# Altium PCB motor_driver.PcbDoc (part 2 of 4)
Units mil, origin at the board's own origin, x right, y up, seen from the top; angles counter-clockwise.
Board outline 2915 x 1500 mil, 2 copper layers (Top Layer, Bottom Layer); 45 components, 39 nets, 213 pads, 173 vias.
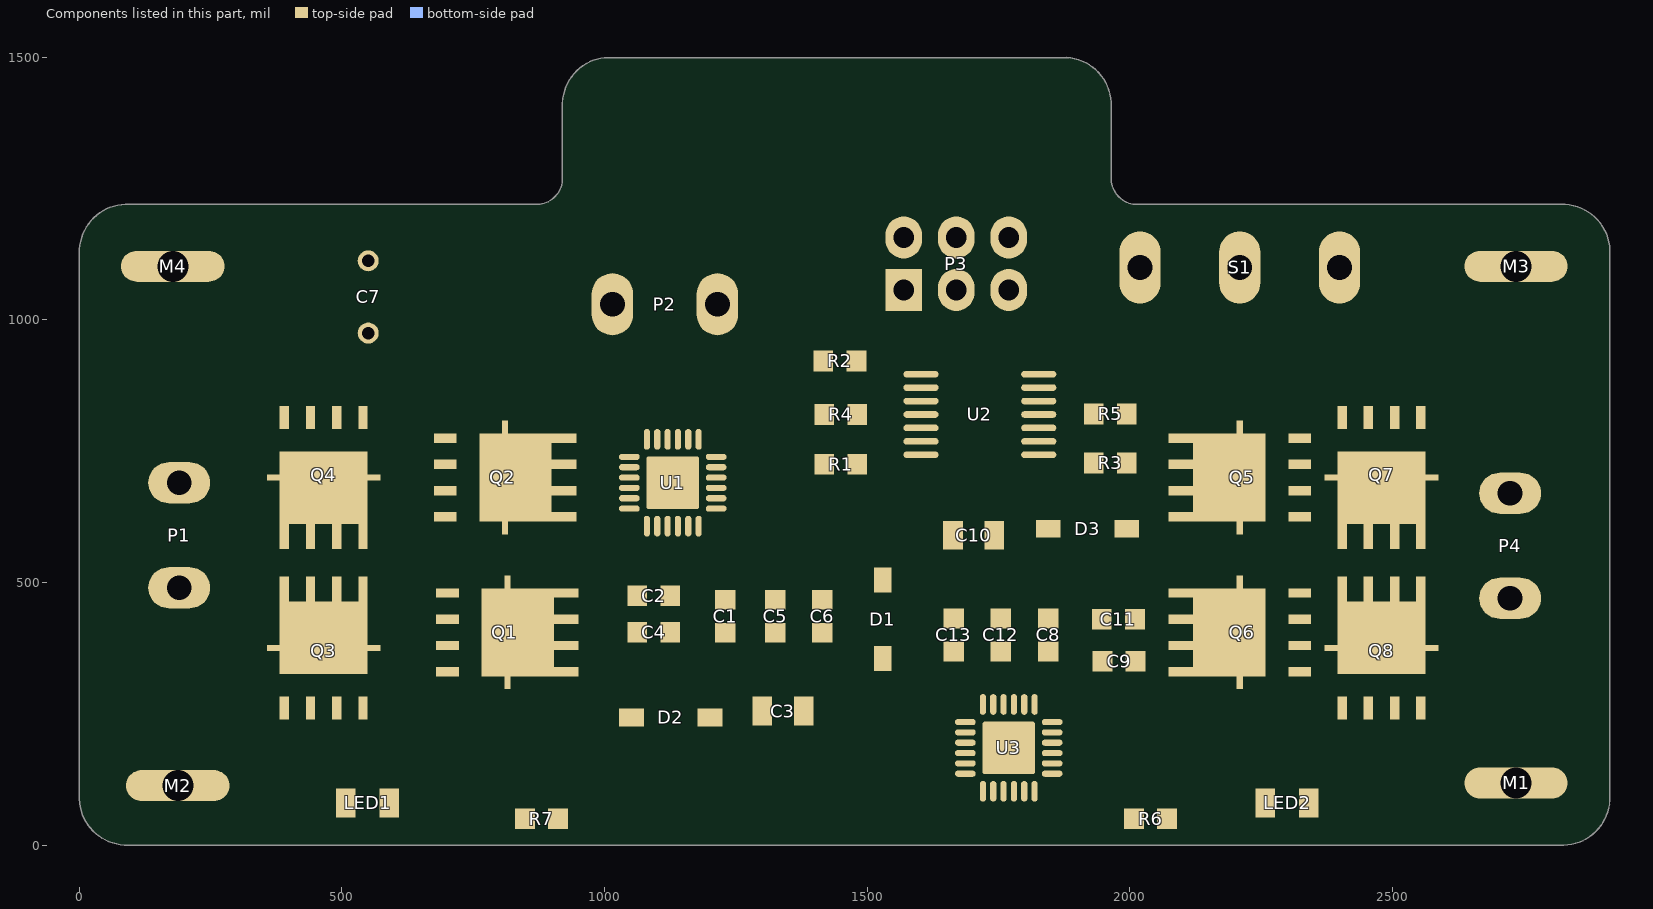
[diagram p2: the components of this part, seen from the top]

## Via types
v1: diameter 22, hole 12, Top Layer to Bottom Layer, tented both sides, 173 vias

## Nets (pads, with @x,y where several pads share a name; then routed paths per layer and width w, separated by ;. In a path a pad name is that pad's centre, name@x,y a point inside that pad or via, vN(x,y) a via of type N, cw(c..) or ccw(c..) an arc to the next point about the centre after c; other vN are vias at no path point) (continued)
copper on no net: (continued)
  Top Layer w1.05: 949.45,1397 953.65,1397 ; 949.45,1398.05 956.8,1398.05 ; 949.45,1399.1 957.85,1399.1 ; 949.45,1400.15 957.85,1400.15 ; 949.45,1450.55 953.65,1450.55 ; 949.45,1451.6 951.55,1451.6 ; 950.5,1401.2 957.85,1401.2 ; 950.5,1402.25 957.85,1402.25 ; 950.5,1403.3 957.85,1403.3 ; 950.5,1404.35 957.85,1404.35 ; 950.5,1405.4 957.85,1405.4 ; 950.5,1406.45 957.85,1406.45 ; 950.5,1407.5 957.85,1407.5 ; 950.5,1408.55 957.85,1408.55 ; 950.5,1409.6 975.7,1409.6 ; 950.5,1410.65 975.7,1410.65 ; 950.5,1411.7 975.7,1411.7 ; 950.5,1412.75 957.85,1412.75 ; 950.5,1413.8 957.85,1413.8 ; 950.5,1414.85 957.85,1414.85 ; 950.5,1415.9 957.85,1415.9 ; 950.5,1416.95 957.85,1416.95 ; 950.5,1418 957.85,1418 ; 950.5,1419.05 957.85,1419.05 ; 950.5,1420.1 957.85,1420.1 ; 950.5,1421.15 957.85,1421.15 ; 950.5,1422.2 957.85,1422.2 ; 950.5,1423.25 957.85,1423.25 ; 950.5,1424.3 957.85,1424.3 ; 950.5,1425.35 957.85,1425.35 ; 950.5,1426.4 957.85,1426.4 ; 950.5,1427.45 957.85,1427.45 ; 950.5,1428.5 957.85,1428.5 ; 950.5,1429.55 957.85,1429.55 ; 950.5,1430.6 957.85,1430.6 ; 950.5,1431.65 957.85,1431.65 ; 950.5,1432.7 957.85,1432.7 ; 950.5,1433.75 957.85,1433.75 ; 950.5,1434.8 957.85,1434.8 ; 950.5,1435.85 957.85,1435.85 ; 950.5,1436.9 957.85,1436.9 ; 950.5,1437.95 957.85,1437.95 ; 950.5,1439 957.85,1439 ; 950.5,1440.05 957.85,1440.05 ; 950.5,1441.1 957.85,1441.1 ; 950.5,1442.15 957.85,1442.15 ; 950.5,1443.2 957.85,1443.2 ; 950.5,1444.25 957.85,1444.25 ; 950.5,1445.3 977.8,1445.3 ; 950.5,1446.35 978.85,1446.35 ; 950.5,1447.4 978.85,1447.4 ; 950.5,1448.45 957.85,1448.45 ; 950.5,1449.5 955.75,1449.5 ; 967.3,1448.45 977.8,1448.45 ; 968.35,1402.25 971.5,1402.25 ; 968.35,1403.3 974.65,1403.3 ; 968.35,1404.35 975.7,1404.35 ; 968.35,1405.4 976.75,1405.4 ; 968.35,1406.45 976.75,1406.45 ; 968.35,1407.5 976.75,1407.5 ; 968.35,1408.55 975.7,1408.55 ; 968.35,1412.75 975.7,1412.75 ; 968.35,1413.8 975.7,1413.8 ; 968.35,1414.85 975.7,1414.85 ; 968.35,1415.9 975.7,1415.9 ; 968.35,1416.95 975.7,1416.95 ; 968.35,1418 975.7,1418 ; 968.35,1419.05 976.75,1419.05 ; 968.35,1420.1 977.8,1420.1 ; 968.35,1421.15 979.9,1421.15 ; 968.35,1422.2 980.95,1422.2 ; 968.35,1423.25 975.7,1423.25 ; 968.35,1424.3 975.7,1424.3 ; 968.35,1425.35 975.7,1425.35 ; 968.35,1426.4 975.7,1426.4 ; 968.35,1427.45 975.7,1427.45 ; 968.35,1428.5 975.7,1428.5 ; 968.35,1429.55 975.7,1429.55 ; 968.35,1430.6 975.7,1430.6 ; 968.35,1431.65 975.7,1431.65 ; 968.35,1432.7 975.7,1432.7 ; 968.35,1433.75 975.7,1433.75 ; 968.35,1434.8 975.7,1434.8 ; 968.35,1435.85 975.7,1435.85 ; 968.35,1436.9 975.7,1436.9 ; 968.35,1437.95 975.7,1437.95 ; 968.35,1439 975.7,1439 ; 968.35,1440.05 975.7,1440.05 ; 968.35,1441.1 975.7,1441.1 ; 968.35,1442.15 975.7,1442.15 ; 968.35,1443.2 975.7,1443.2 ; 968.35,1444.25 976.75,1444.25 ; 968.35,1449.5 975.7,1449.5 ; 968.35,1450.55 973.6,1450.55 ; 976.75,1423.25 982,1423.25 ; 977.8,1424.3 983.05,1424.3 ; 978.85,1425.35 984.1,1425.35 ; 979.9,1426.4 985.15,1426.4 ; 980.95,1374.95 983.05,1374.95 ; 980.95,1376 986.2,1376 ; 980.95,1377.05 988.3,1377.05 ; 980.95,1378.1 989.35,1378.1 ; 980.95,1379.15 989.35,1379.15 ; 980.95,1380.2 989.35,1380.2 ; 980.95,1381.25 989.35,1381.25 ; 980.95,1382.3 989.35,1382.3 ; 980.95,1410.65 1022.95,1410.65 ; 980.95,1411.7 990.4,1411.7 ; 980.95,1412.75 987.25,1412.75 ; 980.95,1413.8 984.1,1413.8 ; 980.95,1427.45 986.2,1427.45 ; 980.95,1428.5 987.25,1428.5 ; 982,1383.35 989.35,1383.35 ; 982,1384.4 989.35,1384.4 ; 982,1385.45 989.35,1385.45 ; 982,1386.5 1020.85,1386.5 ; 982,1387.55 1020.85,1387.55 ; 982,1388.6 1020.85,1388.6 ; 982,1389.65 989.35,1389.65 ; 982,1390.7 989.35,1390.7 ; 982,1391.75 989.35,1391.75 ; 982,1392.8 989.35,1392.8 ; 982,1393.85 989.35,1393.85 ; 982,1394.9 989.35,1394.9 ; 982,1395.95 989.35,1395.95 ; 982,1397 989.35,1397 ; 982,1398.05 989.35,1398.05 ; 982,1399.1 989.35,1399.1 ; 982,1400.15 989.35,1400.15 ; 982,1401.2 989.35,1401.2 ; 982,1402.25 989.35,1402.25 ; 982,1403.3 989.35,1403.3 ; 982,1404.35 989.35,1404.35 ; 982,1405.4 989.35,1405.4 ; 982,1406.45 989.35,1406.45 ; 982,1407.5 989.35,1407.5 ; 982,1408.55 1024,1408.55 ; 982,1409.6 1024,1409.6 ; 982,1429.55 988.3,1429.55 ; 983.05,1430.6 989.35,1430.6 ; 984.1,1431.65 990.4,1431.65 ; 984.1,1432.7 991.45,1432.7 ; 985.15,1424.3 1017.7,1424.3 ; 985.15,1425.35 1016.65,1425.35 ; 985.15,1433.75 991.45,1433.75 ; 986.2,1423.25 1017.7,1423.25 ; 986.2,1434.8 992.5,1434.8 ; 986.2,1435.85 993.55,1435.85 ; 987.25,1436.9 994.6,1436.9 ; 987.25,1437.95 994.6,1437.95 ; 988.3,1439 995.65,1439 ; 988.3,1440.05 996.7,1440.05 ; 989.35,1441.1 996.7,1441.1 ; 989.35,1442.15 997.75,1442.15 ; 990.4,1443.2 998.8,1443.2 ; 990.4,1444.25 998.8,1444.25 ; 991.45,1445.3 999.85,1445.3 ; 991.45,1446.35 999.85,1446.35 ; 992.5,1447.4 1000.9,1447.4 ; 992.5,1448.45 1000.9,1448.45 ; 992.5,1449.5 1001.95,1449.5 ; 993.55,1450.55 1001.95,1450.55 ; 993.55,1451.6 1007.2,1451.6 ; 993.55,1452.65 1006.15,1452.65 ; 994.6,1453.7 1006.15,1453.7 ; 994.6,1454.75 1005.1,1454.75 ; 994.6,1455.8 1005.1,1455.8 ; 995.65,1456.85 1006.15,1456.85 ; 995.65,1457.9 1008.25,1457.9 ; 995.65,1458.95 1008.25,1458.95 ; 996.7,1460 1007.2,1460 ; 996.7,1461.05 1005.1,1461.05 ; 996.7,1462.1 1001.95,1462.1 ; 1004.05,1448.45 1009.3,1448.45 ; 1004.05,1449.5 1008.25,1449.5 ; 1004.05,1450.55 1007.2,1450.55 ; 1005.1,1426.4 1015.6,1426.4 ; 1005.1,1446.35 1010.35,1446.35 ; 1005.1,1447.4 1009.3,1447.4 ; 1006.15,1427.45 1014.55,1427.45 ; 1006.15,1444.25 1011.4,1444.25 ; 1006.15,1445.3 1011.4,1445.3 ; 1007.2,1428.5 1013.5,1428.5 ; 1007.2,1429.55 1012.45,1429.55 ; 1007.2,1442.15 1013.5,1442.15 ; 1007.2,1443.2 1012.45,1443.2 ; 1008.25,1430.6 1010.35,1430.6 ; 1008.25,1440.05 1015.6,1440.05 ; 1008.25,1441.1 1014.55,1441.1 ; 1009.3,1437.95 1017.7,1437.95 ; 1009.3,1439 1016.65,1439 ; 1010.35,1436.9 1018.75,1436.9 ; 1011.4,1411.7 1020.85,1411.7 ; 1011.4,1434.8 1020.85,1434.8 ; 1011.4,1435.85 1019.8,1435.85 ; 1012.45,1377.05 1016.65,1377.05 ; 1012.45,1378.1 1019.8,1378.1 ; 1012.45,1379.15 1020.85,1379.15 ; 1012.45,1380.2 1020.85,1380.2 ; 1012.45,1381.25 1020.85,1381.25 ; 1012.45,1382.3 1020.85,1382.3 ; 1012.45,1383.35 1020.85,1383.35 ; 1012.45,1384.4 1020.85,1384.4 ; 1012.45,1385.45 1020.85,1385.45 ; 1012.45,1389.65 1020.85,1389.65 ; 1012.45,1390.7 1020.85,1390.7 ; 1012.45,1391.75 1020.85,1391.75 ; 1012.45,1392.8 1020.85,1392.8 ; 1012.45,1393.85 1020.85,1393.85 ; 1012.45,1394.9 1020.85,1394.9 ; 1012.45,1395.95 1020.85,1395.95 ; 1012.45,1397 1020.85,1397 ; 1012.45,1398.05 1020.85,1398.05 ; 1012.45,1399.1 1020.85,1399.1 ; 1012.45,1400.15 1020.85,1400.15 ; 1012.45,1401.2 1020.85,1401.2 ; 1012.45,1402.25 1020.85,1402.25 ; 1012.45,1403.3 1020.85,1403.3 ; 1012.45,1404.35 1020.85,1404.35 ; 1012.45,1405.4 1020.85,1405.4 ; 1012.45,1406.45 1021.9,1406.45 ; 1012.45,1407.5 1022.95,1407.5 ; 1012.45,1412.75 1019.8,1412.75 ; 1012.45,1413.8 1018.75,1413.8 ; 1012.45,1433.75 1022.95,1433.75 ; 1013.5,1414.85 1016.65,1414.85 ; 1013.5,1432.7 1025.05,1432.7 ; 1014.55,1430.6 1029.25,1430.6 ; 1014.55,1431.65 1027.15,1431.65 ; 1015.6,1429.55 1032.4,1429.55 ; 1016.65,1428.5 1035.55,1428.5 ; 1017.7,1427.45 1034.5,1427.45 ; 1018.75,1426.4 1033.45,1426.4 ; 1019.8,1425.35 1030.3,1425.35 ; 1020.85,1424.3 1028.2,1424.3 ; 1022.95,1423.25 1028.2,1423.25 ; 1024,1422.2 1027.15,1422.2 ; 1041.85,1243.7 1087,1243.7 ; 1041.85,1244.75 1087,1244.75 ; 1041.85,1245.8 1087,1245.8 ; 1041.85,1246.85 1087,1246.85 ; 1042.9,1247.9 1087,1247.9 ; 1042.9,1284.65 1048.15,1284.65 ; 1042.9,1285.7 1048.15,1285.7 ; 1042.9,1286.75 1047.1,1286.75 ; 1042.9,1287.8 1047.1,1287.8 ; 1042.9,1288.85 1048.15,1288.85 ; 1042.9,1289.9 1048.15,1289.9 ; 1042.9,1290.95 1048.15,1290.95 ; 1042.9,1292 1048.15,1292 ; 1042.9,1386.5 1045,1386.5 ; 1042.9,1387.55 1046.05,1387.55 ; 1043.95,1248.95 1087,1248.95 ; 1043.95,1293.05 1048.15,1293.05 ; 1043.95,1294.1 1049.2,1294.1 ; 1043.95,1295.15 1049.2,1295.15 ; 1043.95,1296.2 1050.25,1296.2 ; 1043.95,1388.6 1048.15,1388.6 ; 1043.95,1418 1047.1,1418 ; 1045,1250 1088.05,1250 ; 1045,1297.25 1050.25,1297.25 ; 1045,1298.3 1051.3,1298.3 ; 1045,1389.65 1049.2,1389.65 ; 1045,1416.95 1046.05,1416.95 ; 1045,1419.05 1048.15,1419.05 ; 1046.05,1299.35 1052.35,1299.35 ; 1046.05,1390.7 1050.25,1390.7 ; 1046.05,1420.1 1049.2,1420.1 ; 1046.05,1421.15 1050.25,1421.15 ; 1047.1,1251.05 1053.4,1251.05 ; 1047.1,1300.4 1053.4,1300.4 ; 1047.1,1301.45 1054.45,1301.45 ; 1047.1,1391.75 1051.3,1391.75 ; 1047.1,1422.2 1051.3,1422.2 ; 1048.15,1252.1 1054.45,1252.1 ; 1048.15,1302.5 1056.55,1302.5 ; 1048.15,1392.8 1053.4,1392.8 ; 1048.15,1423.25 1052.35,1423.25 ; 1049.2,1253.15 1056.55,1253.15 ; 1049.2,1303.55 1058.65,1303.55 ; 1049.2,1393.85 1054.45,1393.85 ; 1049.2,1424.3 1053.4,1424.3 ; 1049.2,1425.35 1054.45,1425.35 ; 1050.25,1304.6 1081.75,1304.6 ; 1050.25,1394.9 1055.5,1394.9 ; 1050.25,1395.95 1056.55,1395.95 ; 1050.25,1426.4 1055.5,1426.4 ; 1051.3,1254.2 1057.6,1254.2 ; 1051.3,1397 1057.6,1397 ; 1051.3,1427.45 1056.55,1427.45 ; 1052.35,1255.25 1059.7,1255.25 ; 1052.35,1305.65 1080.7,1305.65 ; 1052.35,1398.05 1058.65,1398.05 ; 1052.35,1428.5 1057.6,1428.5 ; 1052.35,1429.55 1058.65,1429.55 ; 1053.4,1256.3 1060.75,1256.3 ; 1053.4,1306.7 1078.6,1306.7 ; 1053.4,1399.1 1059.7,1399.1 ; 1053.4,1430.6 1059.7,1430.6 ; 1054.45,1257.35 1062.85,1257.35 ; 1054.45,1400.15 1060.75,1400.15 ; 1054.45,1401.2 1061.8,1401.2 ; 1054.45,1431.65 1059.7,1431.65 ; 1054.45,1432.7 1060.75,1432.7 ; 1055.5,1307.75 1076.5,1307.75 ; 1055.5,1402.25 1062.85,1402.25 ; 1055.5,1433.75 1061.8,1433.75 ; 1055.5,1434.8 1062.85,1434.8 ; 1056.55,1258.4 1063.9,1258.4 ; 1056.55,1403.3 1063.9,1403.3 ; 1056.55,1404.35 1064.95,1404.35 ; 1056.55,1435.85 1062.85,1435.85 ; 1057.6,1259.45 1066,1259.45 ; 1057.6,1405.4 1066,1405.4 ; 1057.6,1436.9 1063.9,1436.9 ; 1057.6,1437.95 1064.95,1437.95 ; 1058.65,1260.5 1067.05,1260.5 ; 1058.65,1308.8 1074.4,1308.8 ; 1058.65,1406.45 1067.05,1406.45 ; 1058.65,1407.5 1067.05,1407.5 ; 1058.65,1439 1064.95,1439 ; 1058.65,1440.05 1066,1440.05 ; 1059.7,1261.55 1068.1,1261.55 ; 1059.7,1408.55 1068.1,1408.55 ; 1059.7,1441.1 1067.05,1441.1 ; 1059.7,1442.15 1067.05,1442.15 ; 1060.75,1409.6 1069.15,1409.6 ; 1060.75,1410.65 1070.2,1410.65 ; 1060.75,1443.2 1068.1,1443.2 ; 1060.75,1444.25 1124.8,1444.25 ; 1060.75,1445.3 1123.75,1445.3 ; 1061.8,1262.6 1070.2,1262.6 ; 1061.8,1411.7 1070.2,1411.7 ; 1061.8,1446.35 1122.7,1446.35 ; 1061.8,1447.4 1071.25,1447.4 ; 1062.85,1263.65 1071.25,1263.65 ; 1062.85,1412.75 1071.25,1412.75 ; 1062.85,1413.8 1072.3,1413.8 ; 1062.85,1448.45 1071.25,1448.45 ; 1062.85,1449.5 1072.3,1449.5 ; 1063.9,1264.7 1072.3,1264.7 ; 1063.9,1414.85 1072.3,1414.85 ; 1063.9,1415.9 1073.35,1415.9 ; 1063.9,1450.55 1072.3,1450.55 ; 1063.9,1451.6 1073.35,1451.6 ; 1063.9,1452.65 1074.4,1452.65 ; 1064.95,1265.75 1074.4,1265.75 ; 1064.95,1416.95 1074.4,1416.95 ; 1064.95,1418 1075.45,1418 ; 1064.95,1453.7 1074.4,1453.7 ; 1064.95,1454.75 1075.45,1454.75 ; 1066,1266.8 1075.45,1266.8 ; 1066,1419.05 1076.5,1419.05 ; 1066,1420.1 1079.65,1420.1 ; 1066,1455.8 1075.45,1455.8 ; 1066,1456.85 1076.5,1456.85 ; 1066,1457.9 1079.65,1457.9 ; 1067.05,1267.85 1076.5,1267.85 ; 1067.05,1421.15 1079.65,1421.15 ; 1067.05,1422.2 1078.6,1422.2 ; 1067.05,1458.95 1080.7,1458.95 ; 1067.05,1460 1078.6,1460 ; 1067.05,1461.05 1076.5,1461.05 ; 1068.1,1268.9 1077.55,1268.9 ; 1068.1,1387.55 1093.3,1387.55 ; 1068.1,1388.6 1093.3,1388.6 ; 1068.1,1423.25 1076.5,1423.25 ; 1068.1,1424.3 1074.4,1424.3 ; 1068.1,1462.1 1073.35,1462.1 ; 1068.1,1463.15 1071.25,1463.15 ; 1069.15,1269.95 1078.6,1269.95 ; 1069.15,1425.35 1072.3,1425.35 ; 1069.15,1426.4 1070.2,1426.4 ; 1070.2,1271 1079.65,1271 ; 1070.2,1303.55 1082.8,1303.55 ; 1071.25,1272.05 1080.7,1272.05 ; 1072.3,1273.1 1081.75,1273.1 ; 1072.3,1302.5 1083.85,1302.5 ; 1072.3,1386.5 1093.3,1386.5 ; 1073.35,1274.15 1082.8,1274.15 ; 1074.4,1275.2 1083.85,1275.2 ; 1074.4,1301.45 1084.9,1301.45 ; 1074.4,1385.45 1093.3,1385.45 ; 1075.45,1276.25 1084.9,1276.25 ; 1075.45,1277.3 1084.9,1277.3 ; 1075.45,1300.4 1085.95,1300.4 ; 1076.5,1278.35 1085.95,1278.35 ; 1076.5,1299.35 1085.95,1299.35 ; 1077.55,1279.4 1087,1279.4 ; 1077.55,1280.45 1087,1280.45 ; 1077.55,1297.25 1087,1297.25 ; 1077.55,1298.3 1087,1298.3 ; 1077.55,1384.4 1093.3,1384.4 ; 1078.6,1281.5 1087,1281.5 ; 1078.6,1282.55 1088.05,1282.55 ; 1078.6,1283.6 1088.05,1283.6 ; 1078.6,1294.1 1088.05,1294.1 ; 1078.6,1295.15 1088.05,1295.15 ; 1078.6,1296.2 1088.05,1296.2 ; 1078.6,1383.35 1092.25,1383.35 ; 1079.65,1284.65 1088.05,1284.65 ; 1079.65,1285.7 1088.05,1285.7 ; 1079.65,1286.75 1088.05,1286.75 ; 1079.65,1287.8 1088.05,1287.8 ; 1079.65,1288.85 1088.05,1288.85 ; 1079.65,1289.9 1088.05,1289.9 ; 1079.65,1290.95 1088.05,1290.95 ; 1079.65,1292 1088.05,1292 ; 1079.65,1293.05 1088.05,1293.05 ; 1079.65,1381.25 1091.2,1381.25 ; 1079.65,1382.3 1092.25,1382.3 ; 1080.7,1378.1 1085.95,1378.1 ; 1080.7,1379.15 1088.05,1379.15 ; 1080.7,1380.2 1090.15,1380.2 ; 1081.75,1251.05 1088.05,1251.05 ; 1081.75,1377.05 1082.8,1377.05 ; 1082.8,1241.6 1085.95,1241.6 ; 1082.8,1242.65 1085.95,1242.65 ; 1082.8,1252.1 1088.05,1252.1 ; 1083.85,1253.15 1088.05,1253.15 ; 1083.85,1389.65 1093.3,1389.65 ; 1083.85,1390.7 1093.3,1390.7 ; 1083.85,1439 1093.3,1439 ; 1083.85,1440.05 1089.1,1440.05 ; 1084.9,1254.2 1088.05,1254.2 ; 1084.9,1255.25 1089.1,1255.25 ; 1084.9,1256.3 1089.1,1256.3 ; 1084.9,1257.35 1089.1,1257.35 ; 1084.9,1391.75 1093.3,1391.75 ; 1084.9,1392.8 1093.3,1392.8 ; 1084.9,1393.85 1093.3,1393.85 ; 1084.9,1394.9 1093.3,1394.9 ; 1084.9,1395.95 1093.3,1395.95 ; 1084.9,1397 1093.3,1397 ; 1084.9,1398.05 1093.3,1398.05 ; 1084.9,1399.1 1093.3,1399.1 ; 1084.9,1400.15 1093.3,1400.15 ; 1084.9,1401.2 1093.3,1401.2 ; 1084.9,1402.25 1093.3,1402.25 ; 1084.9,1403.3 1093.3,1403.3 ; 1084.9,1404.35 1093.3,1404.35 ; 1084.9,1405.4 1093.3,1405.4 ; 1084.9,1406.45 1093.3,1406.45 ; 1084.9,1407.5 1093.3,1407.5 ; 1084.9,1408.55 1093.3,1408.55 ; 1084.9,1409.6 1093.3,1409.6 ; 1084.9,1410.65 1093.3,1410.65 ; 1084.9,1411.7 1093.3,1411.7 ; 1084.9,1412.75 1093.3,1412.75 ; 1084.9,1413.8 1093.3,1413.8 ; 1084.9,1414.85 1093.3,1414.85 ; 1084.9,1415.9 1093.3,1415.9 ; 1084.9,1416.95 1093.3,1416.95 ; 1084.9,1418 1093.3,1418 ; 1084.9,1419.05 1093.3,1419.05 ; 1084.9,1420.1 1093.3,1420.1 ; 1084.9,1421.15 1093.3,1421.15 ; 1084.9,1422.2 1093.3,1422.2 ; 1084.9,1423.25 1093.3,1423.25 ; 1084.9,1424.3 1093.3,1424.3 ; 1084.9,1425.35 1093.3,1425.35 ; 1084.9,1426.4 1093.3,1426.4 ; 1084.9,1427.45 1093.3,1427.45 ; 1084.9,1428.5 1093.3,1428.5 ; 1084.9,1429.55 1093.3,1429.55 ; 1084.9,1430.6 1093.3,1430.6 ; 1084.9,1431.65 1093.3,1431.65 ; 1084.9,1432.7 1093.3,1432.7 ; 1084.9,1433.75 1093.3,1433.75 ; 1084.9,1434.8 1093.3,1434.8 ; 1084.9,1435.85 1094.35,1435.85 ; 1084.9,1436.9 1095.4,1436.9 ; 1084.9,1437.95 1095.4,1437.95 ; 1085.95,1258.4 1089.1,1258.4 ; 1097.5,1422.2 1102.75,1422.2 ; 1098.55,1423.25 1100.65,1423.25 ; 1098.55,1424.3 1099.6,1424.3 ; 1099.6,1421.15 1104.85,1421.15 ; 1100.65,1420.1 1105.9,1420.1 ; 1101.7,1264.7 1111.15,1264.7 ; 1101.7,1265.75 1110.1,1265.75 ; 1101.7,1266.8 1110.1,1266.8 ; 1101.7,1267.85 1110.1,1267.85 ; 1101.7,1268.9 1110.1,1268.9 ; 1101.7,1269.95 1110.1,1269.95 ; 1101.7,1271 1110.1,1271 ; 1101.7,1272.05 1110.1,1272.05 ; 1101.7,1273.1 1110.1,1273.1 ; 1101.7,1274.15 1110.1,1274.15 ; 1101.7,1275.2 1110.1,1275.2 ; 1101.7,1276.25 1110.1,1276.25 ; 1101.7,1277.3 1110.1,1277.3 ; 1101.7,1278.35 1110.1,1278.35 ; 1101.7,1279.4 1110.1,1279.4 ; 1101.7,1280.45 1110.1,1280.45 ; 1101.7,1281.5 1110.1,1281.5 ; 1101.7,1282.55 1110.1,1282.55 ; 1101.7,1283.6 1110.1,1283.6 ; 1101.7,1284.65 1110.1,1284.65 ; 1101.7,1285.7 1111.15,1285.7 ; 1101.7,1286.75 1111.15,1286.75 ; 1101.7,1418 1109.05,1418 ; 1101.7,1419.05 1108,1419.05 ; 1102.75,1260.5 1111.15,1260.5 ; 1102.75,1261.55 1111.15,1261.55 ; 1102.75,1262.6 1111.15,1262.6 ; 1102.75,1263.65 1111.15,1263.65 ; 1102.75,1287.8 1111.15,1287.8 ; 1102.75,1288.85 1111.15,1288.85 ; 1102.75,1289.9 1111.15,1289.9 ; 1102.75,1290.95 1112.2,1290.95 ; 1102.75,1416.95 1111.15,1416.95 ; 1103.8,1257.35 1112.2,1257.35 ; 1103.8,1258.4 1112.2,1258.4 ; 1103.8,1259.45 1112.2,1259.45 ; 1103.8,1292 1112.2,1292 ; 1103.8,1293.05 1112.2,1293.05 ; 1103.8,1294.1 1113.25,1294.1 ; 1103.8,1415.9 1112.2,1415.9 ; 1104.85,1255.25 1113.25,1255.25 ; 1104.85,1256.3 1113.25,1256.3 ; 1104.85,1295.15 1113.25,1295.15 ; 1104.85,1296.2 1114.3,1296.2 ; 1104.85,1414.85 1114.3,1414.85 ; 1105.9,1253.15 1114.3,1253.15 ; 1105.9,1254.2 1114.3,1254.2 ; 1105.9,1297.25 1114.3,1297.25 ; 1105.9,1298.3 1115.35,1298.3 ; 1105.9,1413.8 1115.35,1413.8 ; 1105.9,1430.6 1109.05,1430.6 ; 1106.95,1252.1 1115.35,1252.1 ; 1106.95,1299.35 1115.35,1299.35 ; 1106.95,1412.75 1116.4,1412.75 ; 1106.95,1429.55 1108,1429.55 ; 1106.95,1431.65 1110.1,1431.65 ; 1106.95,1432.7 1111.15,1432.7 ; 1108,1251.05 1116.4,1251.05 ; 1108,1300.4 1116.4,1300.4 ; 1108,1301.45 1117.45,1301.45 ; 1108,1411.7 1118.5,1411.7 ; 1108,1433.75 1112.2,1433.75 ; 1108,1434.8 1113.25,1434.8 ; 1109.05,1248.95 1118.5,1248.95 ; 1109.05,1250 1117.45,1250 ; 1109.05,1302.5 1118.5,1302.5 ; 1109.05,1409.6 1120.6,1409.6 ; 1109.05,1410.65 1119.55,1410.65 ; 1109.05,1435.85 1114.3,1435.85 ; 1109.05,1436.9 1116.4,1436.9 ; 1110.1,1247.9 1120.6,1247.9 ; 1110.1,1303.55 1120.6,1303.55 ; 1110.1,1408.55 1121.65,1408.55 ; 1110.1,1437.95 1117.45,1437.95 ; 1110.1,1439 1118.5,1439 ; 1111.15,1304.6 1123.75,1304.6 ; 1111.15,1406.45 1123.75,1406.45 ; 1111.15,1407.5 1122.7,1407.5 ; 1111.15,1440.05 1121.65,1440.05 ; 1111.15,1441.1 1126.9,1441.1 ; 1112.2,1246.85 1123.75,1246.85 ; 1112.2,1404.35 1124.8,1404.35 ; 1112.2,1405.4 1123.75,1405.4 ; 1112.2,1442.15 1126.9,1442.15 ; 1112.2,1443.2 1125.85,1443.2 ; 1112.2,1447.4 1121.65,1447.4 ; 1113.25,1245.8 1138.45,1245.8 ; 1113.25,1305.65 1138.45,1305.65 ; 1113.25,1402.25 1125.85,1402.25 ; 1113.25,1403.3 1124.8,1403.3 ; 1113.25,1448.45 1120.6,1448.45 ; 1113.25,1449.5 1119.55,1449.5 ; 1114.3,1244.75 1136.35,1244.75 ; 1114.3,1400.15 1125.85,1400.15 ; 1114.3,1401.2 1125.85,1401.2 ; 1114.3,1450.55 1117.45,1450.55 ; 1115.35,1306.7 1136.35,1306.7 ; 1115.35,1398.05 1125.85,1398.05 ; 1115.35,1399.1 1125.85,1399.1 ; 1116.4,1243.7 1134.25,1243.7 ; 1116.4,1394.9 1125.85,1394.9 ; 1116.4,1395.95 1125.85,1395.95 ; 1116.4,1397 1125.85,1397 ; 1117.45,1307.75 1134.25,1307.75 ; 1117.45,1392.8 1124.8,1392.8 ; 1117.45,1393.85 1124.8,1393.85 ; 1118.5,1391.75 1123.75,1391.75 ; 1119.55,1390.7 1121.65,1390.7 ; 1120.6,1242.65 1131.1,1242.65 ; 1120.6,1308.8 1131.1,1308.8 ; 1127.95,1246.85 1139.5,1246.85 ; 1127.95,1304.6 1139.5,1304.6 ; 1131.1,1247.9 1140.55,1247.9 ; 1131.1,1303.55 1141.6,1303.55 ; 1133.2,1248.95 1141.6,1248.95 ; 1133.2,1302.5 1142.65,1302.5 ; 1134.25,1250 1142.65,1250 ; 1134.25,1301.45 1142.65,1301.45 ; 1135.3,1251.05 1143.7,1251.05 ; 1135.3,1300.4 1143.7,1300.4 ; 1135.3,1437.95 1140.55,1437.95 ; 1136.35,1252.1 1144.75,1252.1 ; 1136.35,1253.15 1144.75,1253.15 ; 1136.35,1298.3 1144.75,1298.3 ; 1136.35,1299.35 1144.75,1299.35 ; 1136.35,1405.4 1153.15,1405.4 ; 1136.35,1406.45 1137.4,1406.45 ; 1136.35,1436.9 1143.7,1436.9 ; 1136.35,1439 1137.4,1439 ; 1137.4,1254.2 1145.8,1254.2 ; 1137.4,1255.25 1145.8,1255.25 ; 1137.4,1297.25 1145.8,1297.25 ; 1137.4,1435.85 1145.8,1435.85 ; 1138.45,1256.3 1146.85,1256.3 ; 1138.45,1257.35 1146.85,1257.35 ; 1138.45,1294.1 1146.85,1294.1 ; 1138.45,1295.15 1146.85,1295.15 ; 1138.45,1296.2 1146.85,1296.2 ; 1138.45,1404.35 1152.1,1404.35 ; 1138.45,1434.8 1147.9,1434.8 ; 1139.5,1258.4 1147.9,1258.4 ; 1139.5,1259.45 1147.9,1259.45 ; 1139.5,1260.5 1148.95,1260.5 ; 1139.5,1290.95 1148.95,1290.95 ; 1139.5,1292 1147.9,1292 ; 1139.5,1293.05 1147.9,1293.05 ; 1139.5,1433.75 1150,1433.75 ; 1140.55,1261.55 1148.95,1261.55 ; 1140.55,1262.6 1148.95,1262.6 ; 1140.55,1263.65 1148.95,1263.65 ; 1140.55,1264.7 1150,1264.7 ; 1140.55,1265.75 1150,1265.75 ; 1140.55,1285.7 1150,1285.7 ; 1140.55,1286.75 1150,1286.75 ; 1140.55,1287.8 1148.95,1287.8 ; 1140.55,1288.85 1148.95,1288.85 ; 1140.55,1289.9 1148.95,1289.9 ; 1140.55,1432.7 1151.05,1432.7 ; 1141.6,1266.8 1150,1266.8 ; 1141.6,1267.85 1150,1267.85 ; 1141.6,1268.9 1150,1268.9 ; 1141.6,1269.95 1150,1269.95 ; 1141.6,1271 1150,1271 ; 1141.6,1272.05 1150,1272.05 ; 1141.6,1273.1 1150,1273.1 ; 1141.6,1274.15 1150,1274.15 ; 1141.6,1275.2 1150,1275.2 ; 1141.6,1276.25 1150,1276.25 ; 1141.6,1277.3 1150,1277.3 ; 1141.6,1278.35 1150,1278.35 ; 1141.6,1279.4 1150,1279.4 ; 1141.6,1280.45 1150,1280.45 ; 1141.6,1281.5 1150,1281.5 ; 1141.6,1282.55 1150,1282.55 ; 1141.6,1283.6 1150,1283.6 ; 1141.6,1284.65 1150,1284.65 ; 1141.6,1381.25 1152.1,1381.25 ; 1141.6,1382.3 1152.1,1382.3 ; 1141.6,1383.35 1152.1,1383.35 ; 1141.6,1384.4 1152.1,1384.4 ; 1141.6,1385.45 1152.1,1385.45 ; 1141.6,1386.5 1152.1,1386.5 ; 1141.6,1403.3 1152.1,1403.3 ; 1141.6,1430.6 1152.1,1430.6 ; 1141.6,1431.65 1151.05,1431.65 ; 1142.65,1379.15 1152.1,1379.15 ; 1142.65,1380.2 1152.1,1380.2 ; 1142.65,1387.55 1152.1,1387.55 ; 1142.65,1388.6 1152.1,1388.6 ; 1142.65,1389.65 1152.1,1389.65 ; 1142.65,1402.25 1152.1,1402.25 ; 1142.65,1429.55 1152.1,1429.55 ; 1143.7,1378.1 1152.1,1378.1 ; 1143.7,1390.7 1152.1,1390.7 ; 1143.7,1391.75 1152.1,1391.75 ; 1143.7,1392.8 1152.1,1392.8 ; 1143.7,1393.85 1152.1,1393.85 ; 1143.7,1401.2 1152.1,1401.2 ; 1143.7,1406.45 1153.15,1406.45 ; 1143.7,1427.45 1151.05,1427.45 ; 1143.7,1428.5 1152.1,1428.5 ; 1143.7,1458.95 1150,1458.95 ; 1143.7,1460 1147.9,1460 ; 1143.7,1461.05 1145.8,1461.05 ; 1144.75,1394.9 1152.1,1394.9 ; 1144.75,1395.95 1152.1,1395.95 ; 1144.75,1397 1152.1,1397 ; 1144.75,1398.05 1152.1,1398.05 ; 1144.75,1399.1 1152.1,1399.1 ; 1144.75,1400.15 1152.1,1400.15 ; 1144.75,1425.35 1151.05,1425.35 ; 1144.75,1426.4 1151.05,1426.4 ; 1144.75,1457.9 1152.1,1457.9 ; 1145.8,1377.05 1151.05,1377.05 ; 1145.8,1423.25 1150,1423.25 ; 1145.8,1424.3 1150,1424.3 ; 1145.8,1456.85 1154.2,1456.85 ; 1146.85,1407.5 1153.15,1407.5 ; 1146.85,1454.75 1158.4,1454.75 ; 1146.85,1455.8 1156.3,1455.8 ; 1147.9,1408.55 1154.2,1408.55 ; 1147.9,1453.7 1159.45,1453.7 ; 1148.95,1409.6 1154.2,1409.6 ; 1148.95,1410.65 1154.2,1410.65 ; 1148.95,1451.6 1159.45,1451.6 ; 1148.95,1452.65 1159.45,1452.65 ; 1150,1411.7 1155.25,1411.7 ; 1150,1412.75 1155.25,1412.75 ; 1150,1450.55 1159.45,1450.55 ; 1151.05,1413.8 1155.25,1413.8 ; 1151.05,1414.85 1156.3,1414.85 ; 1151.05,1448.45 1159.45,1448.45 ; 1151.05,1449.5 1159.45,1449.5 ; 1152.1,1415.9 1156.3,1415.9 ; 1152.1,1416.95 1156.3,1416.95 ; 1152.1,1446.35 1158.4,1446.35 ; 1152.1,1447.4 1159.45,1447.4 ; 1153.15,1418 1157.35,1418 ; 1153.15,1419.05 1157.35,1419.05 ; 1153.15,1444.25 1157.35,1444.25 ; 1153.15,1445.3 1158.4,1445.3 ; 1154.2,1376 1159.45,1376 ; 1154.2,1420.1 1158.4,1420.1 ; 1154.2,1421.15 1158.4,1421.15 ; 1154.2,1443.2 1156.3,1443.2 ; 1155.25,1374.95 1156.3,1374.95 ; 1155.25,1422.2 1158.4,1422.2 ; 1155.25,1423.25 1159.45,1423.25 ; 1156.3,1377.05 1161.55,1377.05 ; 1156.3,1424.3 1159.45,1424.3 ; 1156.3,1425.35 1159.45,1425.35 ; 1157.35,1378.1 1164.7,1378.1 ; 1157.35,1400.15 1224.55,1400.15 ; 1157.35,1401.2 1224.55,1401.2 ; 1157.35,1402.25 1223.5,1402.25 ; 1157.35,1426.4 1160.5,1426.4 ; 1157.35,1427.45 1160.5,1427.45 ; 1157.35,1428.5 1160.5,1428.5 ; 1158.4,1429.55 1161.55,1429.55 ; 1158.4,1430.6 1161.55,1430.6 ; 1159.45,1243.7 1204.6,1243.7 ; 1159.45,1244.75 1204.6,1244.75 ; 1159.45,1245.8 1204.6,1245.8 ; 1159.45,1246.85 1204.6,1246.85 ; 1159.45,1379.15 1166.8,1379.15 ; 1159.45,1431.65 1162.6,1431.65 ; 1159.45,1432.7 1162.6,1432.7 ; 1160.5,1247.9 1205.65,1247.9 ; 1160.5,1380.2 1168.9,1380.2 ; 1160.5,1433.75 1162.6,1433.75 ; 1160.5,1434.8 1163.65,1434.8 ; 1160.5,1437.95 1168.9,1437.95 ; 1160.5,1439 1169.95,1439 ; 1160.5,1440.05 1171,1440.05 ; 1160.5,1441.1 1171,1441.1 ; 1161.55,1248.95 1205.65,1248.95 ; 1161.55,1284.65 1165.75,1284.65 ; 1161.55,1285.7 1165.75,1285.7 ; 1161.55,1286.75 1165.75,1286.75 ; 1161.55,1287.8 1165.75,1287.8 ; 1161.55,1288.85 1165.75,1288.85 ; 1161.55,1289.9 1165.75,1289.9 ; 1161.55,1290.95 1165.75,1290.95 ; 1161.55,1292 1165.75,1292 ; 1161.55,1293.05 1166.8,1293.05 ; 1161.55,1294.1 1166.8,1294.1 ; 1161.55,1295.15 1166.8,1295.15 ; 1161.55,1381.25 1171,1381.25 ; 1161.55,1435.85 1163.65,1435.85 ; 1161.55,1436.9 1166.8,1436.9 ; 1161.55,1442.15 1172.05,1442.15 ; 1162.6,1296.2 1167.85,1296.2 ; 1162.6,1297.25 1167.85,1297.25 ; 1162.6,1443.2 1172.05,1443.2 ; 1163.65,1250 1205.65,1250 ; 1163.65,1298.3 1168.9,1298.3 ; 1163.65,1299.35 1169.95,1299.35 ; 1163.65,1382.3 1172.05,1382.3 ; 1163.65,1444.25 1172.05,1444.25 ; 1164.7,1251.05 1171,1251.05 ; 1164.7,1300.4 1171,1300.4 ; 1164.7,1383.35 1174.15,1383.35 ; 1164.7,1445.3 1172.05,1445.3 ; 1165.75,1252.1 1173.1,1252.1 ; 1165.75,1301.45 1172.05,1301.45 ; 1165.75,1302.5 1174.15,1302.5 ; 1165.75,1384.4 1176.25,1384.4 ; 1165.75,1446.35 1172.05,1446.35 ; 1166.8,1253.15 1174.15,1253.15 ; 1166.8,1303.55 1176.25,1303.55 ; 1166.8,1385.45 1177.3,1385.45 ; 1166.8,1447.4 1172.05,1447.4 ; 1167.85,1386.5 1179.4,1386.5 ; 1167.85,1448.45 1224.55,1448.45 ; 1167.85,1449.5 1223.5,1449.5 ; 1168.9,1254.2 1176.25,1254.2 ; 1168.9,1304.6 1200.4,1304.6 ; 1168.9,1450.55 1223.5,1450.55 ; 1168.9,1451.6 1172.05,1451.6 ; 1168.9,1452.65 1172.05,1452.65 ; 1169.95,1255.25 1177.3,1255.25 ; 1169.95,1305.65 1198.3,1305.65 ; 1169.95,1387.55 1181.5,1387.55 ; 1169.95,1453.7 1172.05,1453.7 ; 1169.95,1454.75 1172.05,1454.75 ; 1171,1256.3 1179.4,1256.3 ; 1171,1388.6 1182.55,1388.6 ; 1171,1403.3 1178.35,1403.3 ; 1171,1404.35 1178.35,1404.35 ; 1171,1405.4 1178.35,1405.4 ; 1171,1406.45 1178.35,1406.45 ; 1171,1407.5 1178.35,1407.5 ; 1171,1408.55 1178.35,1408.55 ; 1171,1409.6 1178.35,1409.6 ; 1171,1410.65 1178.35,1410.65 ; 1171,1411.7 1178.35,1411.7 ; 1171,1412.75 1178.35,1412.75 ; 1171,1413.8 1178.35,1413.8 ; 1171,1414.85 1178.35,1414.85 ; 1171,1415.9 1178.35,1415.9 ; 1171,1416.95 1178.35,1416.95 ; 1171,1418 1178.35,1418 ; 1171,1419.05 1178.35,1419.05 ; 1171,1420.1 1178.35,1420.1 ; 1171,1421.15 1218.25,1421.15 ; 1171,1422.2 1218.25,1422.2 ; 1171,1423.25 1217.2,1423.25 ; 1171,1424.3 1178.35,1424.3 ; 1171,1425.35 1178.35,1425.35 ; 1171,1426.4 1178.35,1426.4 ; 1171,1427.45 1178.35,1427.45 ; 1171,1428.5 1178.35,1428.5 ; 1171,1429.55 1178.35,1429.55 ; 1171,1430.6 1178.35,1430.6 ; 1171,1431.65 1178.35,1431.65 ; 1171,1432.7 1190.95,1432.7 ; 1171,1433.75 1199.35,1433.75 ; 1171,1434.8 1179.4,1434.8 ; 1171,1435.85 1177.3,1435.85 ; 1171,1436.9 1176.25,1436.9 ; 1171,1437.95 1174.15,1437.95 ; 1171,1439 1172.05,1439 ; 1172.05,1306.7 1197.25,1306.7 ; 1172.05,1389.65 1187.8,1389.65 ; 1173.1,1257.35 1180.45,1257.35 ; 1173.1,1390.7 1187.8,1390.7 ; 1174.15,1258.4 1181.5,1258.4 ; 1174.15,1307.75 1195.15,1307.75 ; 1174.15,1391.75 1186.75,1391.75 ; 1175.2,1259.45 1183.6,1259.45 ; 1175.2,1392.8 1185.7,1392.8 ; 1176.25,1260.5 1184.65,1260.5 ; 1176.25,1393.85 1184.65,1393.85 ; 1177.3,1308.8 1192,1308.8 ; 1177.3,1394.9 1182.55,1394.9 ; 1177.3,1395.95 1181.5,1395.95 ; 1178.35,1261.55 1186.75,1261.55 ; 1178.35,1397 1179.4,1397 ; 1179.4,1262.6 1187.8,1262.6 ; 1180.45,1263.65 1188.85,1263.65 ; 1180.45,1434.8 1210.9,1434.8 ; 1181.5,1264.7 1190.95,1264.7 ; 1182.55,1265.75 1192,1265.75 ; 1183.6,1266.8 1193.05,1266.8 ; 1183.6,1435.85 1209.85,1435.85 ; 1183.6,1463.15 1189.9,1463.15 ; 1183.6,1464.2 1185.7,1464.2 ; 1184.65,1462.1 1193.05,1462.1 ; 1185.7,1267.85 1194.1,1267.85 ; 1185.7,1460 1196.2,1460 ; 1185.7,1461.05 1195.15,1461.05 ; 1186.75,1268.9 1195.15,1268.9 ; 1186.75,1458.95 1197.25,1458.95 ; 1187.8,1269.95 1197.25,1269.95 ; 1187.8,1303.55 1201.45,1303.55 ; 1187.8,1436.9 1208.8,1436.9 ; 1187.8,1456.85 1197.25,1456.85 ; 1187.8,1457.9 1197.25,1457.9 ; 1188.85,1271 1198.3,1271 ; 1188.85,1453.7 1197.25,1453.7 ; 1188.85,1454.75 1197.25,1454.75 ; 1188.85,1455.8 1197.25,1455.8 ; 1189.9,1272.05 1199.35,1272.05 ; 1189.9,1302.5 1202.5,1302.5 ; 1189.9,1395.95 1196.2,1395.95 ; 1189.9,1397 1193.05,1397 ; 1189.9,1451.6 1196.2,1451.6 ; 1189.9,1452.65 1196.2,1452.65 ; 1190.95,1273.1 1200.4,1273.1 ; 1190.95,1274.15 1200.4,1274.15 ; 1190.95,1394.9 1199.35,1394.9 ; 1190.95,1437.95 1208.8,1437.95 ; 1192,1275.2 1201.45,1275.2 ; 1192,1301.45 1202.5,1301.45 ; 1192,1393.85 1201.45,1393.85 ; 1193.05,1276.25 1202.5,1276.25 ; 1193.05,1300.4 1203.55,1300.4 ; 1193.05,1403.3 1200.4,1403.3 ; 1193.05,1404.35 1200.4,1404.35 ; 1193.05,1405.4 1200.4,1405.4 ; 1193.05,1406.45 1200.4,1406.45 ; 1193.05,1407.5 1200.4,1407.5 ; 1193.05,1408.55 1200.4,1408.55 ; 1193.05,1409.6 1200.4,1409.6 ; 1193.05,1410.65 1200.4,1410.65 ; 1193.05,1411.7 1200.4,1411.7 ; 1193.05,1412.75 1200.4,1412.75 ; 1193.05,1413.8 1200.4,1413.8 ; 1193.05,1414.85 1200.4,1414.85 ; 1193.05,1415.9 1200.4,1415.9 ; 1193.05,1416.95 1200.4,1416.95 ; 1193.05,1418 1200.4,1418 ; 1193.05,1419.05 1200.4,1419.05 ; 1193.05,1420.1 1200.4,1420.1 ; 1194.1,1277.3 1203.55,1277.3 ; 1194.1,1278.35 1203.55,1278.35 ; 1194.1,1299.35 1204.6,1299.35 ; 1194.1,1392.8 1204.6,1392.8 ; 1194.1,1439 1207.75,1439 ; 1195.15,1279.4 1204.6,1279.4 ; 1195.15,1280.45 1204.6,1280.45 ; 1195.15,1297.25 1205.65,1297.25 ; 1195.15,1298.3 1204.6,1298.3 ; 1195.15,1391.75 1206.7,1391.75 ; 1196.2,1281.5 1205.65,1281.5 ; 1196.2,1282.55 1205.65,1282.55 ; 1196.2,1295.15 1205.65,1295.15 ; 1196.2,1296.2 1205.65,1296.2 ; 1196.2,1390.7 1208.8,1390.7 ; 1197.25,1283.6 1205.65,1283.6 ; 1197.25,1284.65 1205.65,1284.65 ; 1197.25,1285.7 1206.7,1285.7 ; 1197.25,1286.75 1206.7,1286.75 ; 1197.25,1287.8 1206.7,1287.8 ; 1197.25,1288.85 1206.7,1288.85 ; 1197.25,1289.9 1206.7,1289.9 ; 1197.25,1290.95 1206.7,1290.95 ; 1197.25,1292 1206.7,1292 ; 1197.25,1293.05 1206.7,1293.05 ; 1197.25,1294.1 1205.65,1294.1 ; 1197.25,1440.05 1206.7,1440.05 ; 1198.3,1389.65 1210.9,1389.65 ; 1199.35,1251.05 1205.65,1251.05 ; 1199.35,1388.6 1211.95,1388.6 ; 1199.35,1441.1 1205.65,1441.1 ; 1200.4,1241.6 1203.55,1241.6 ; 1200.4,1242.65 1204.6,1242.65 ; 1200.4,1387.55 1214.05,1387.55 ; 1201.45,1252.1 1205.65,1252.1 ; 1201.45,1253.15 1205.65,1253.15 ; 1201.45,1386.5 1215.1,1386.5 ; 1202.5,1254.2 1206.7,1254.2 ; 1202.5,1255.25 1206.7,1255.25 ; 1202.5,1256.3 1206.7,1256.3 ; 1202.5,1257.35 1206.7,1257.35 ; 1202.5,1385.45 1215.1,1385.45 ; 1202.5,1442.15 1204.6,1442.15 ; 1203.55,1258.4 1206.7,1258.4 ; 1203.55,1384.4 1215.1,1384.4 ; 1204.6,1383.35 1216.15,1383.35 ; 1204.6,1424.3 1216.15,1424.3 ; 1205.65,1381.25 1216.15,1381.25 ; 1205.65,1382.3 1216.15,1382.3 ; 1205.65,1425.35 1215.1,1425.35 ; 1206.7,1380.2 1216.15,1380.2 ; 1206.7,1426.4 1214.05,1426.4 ; 1206.7,1427.45 1213,1427.45 ; 1207.75,1378.1 1215.1,1378.1 ; 1207.75,1379.15 1215.1,1379.15 ; 1207.75,1428.5 1211.95,1428.5 ; 1208.8,1377.05 1215.1,1377.05 ; 1208.8,1429.55 1209.85,1429.55 ; 1208.8,1440.05 1211.95,1440.05 ; 1208.8,1441.1 1213,1441.1 ; 1209.85,1376 1214.05,1376 ; 1209.85,1403.3 1222.45,1403.3 ; 1209.85,1442.15 1214.05,1442.15 ; 1209.85,1443.2 1215.1,1443.2 ; 1209.85,1444.25 1216.15,1444.25 ; 1210.9,1404.35 1221.4,1404.35 ; 1210.9,1445.3 1217.2,1445.3 ; 1210.9,1446.35 1220.35,1446.35 ; 1210.9,1447.4 1224.55,1447.4 ; 1210.9,1451.6 1221.4,1451.6 ; 1211.95,1405.4 1220.35,1405.4 ; 1211.95,1406.45 1219.3,1406.45 ; 1211.95,1452.65 1220.35,1452.65 ; 1213,1407.5 1218.25,1407.5 ; 1213,1408.55 1216.15,1408.55 ; 1213,1453.7 1219.3,1453.7 ; 1213,1454.75 1218.25,1454.75 ; 1214.05,1455.8 1216.15,1455.8 ; 1229.8,1243.7 1260.25,1243.7 ; 1229.8,1244.75 1260.25,1244.75 ; 1229.8,1245.8 1260.25,1245.8 ; 1229.8,1246.85 1260.25,1246.85 ; 1229.8,1299.35 1249.75,1299.35 ; 1229.8,1300.4 1249.75,1300.4 ; 1229.8,1301.45 1249.75,1301.45 ; 1229.8,1302.5 1249.75,1302.5 ; 1231.9,1386.5 1319.05,1386.5 ; 1231.9,1387.55 1319.05,1387.55 ; 1232.95,1385.45 1319.05,1385.45 ; 1235.05,1303.55 1249.75,1303.55 ; 1238.2,1304.6 1249.75,1304.6 ; 1239.25,1247.9 1251.85,1247.9 ; 1239.25,1448.45 1312.75,1448.45 ; 1240.3,1248.95 1250.8,1248.95 ; 1240.3,1446.35 1313.8,1446.35 ; 1240.3,1447.4 1313.8,1447.4 ; 1241.35,1250 1249.75,1250 ; 1241.35,1251.05 1249.75,1251.05 ; 1241.35,1252.1 1249.75,1252.1 ; 1241.35,1305.65 1249.75,1305.65 ; 1242.4,1253.15 1249.75,1253.15 ; 1242.4,1254.2 1249.75,1254.2 ; 1242.4,1255.25 1249.75,1255.25 ; 1242.4,1256.3 1249.75,1256.3 ; 1242.4,1257.35 1249.75,1257.35 ; 1242.4,1258.4 1249.75,1258.4 ; 1242.4,1259.45 1249.75,1259.45 ; 1242.4,1260.5 1249.75,1260.5 ; 1242.4,1261.55 1249.75,1261.55 ; 1242.4,1262.6 1249.75,1262.6 ; 1242.4,1263.65 1249.75,1263.65 ; 1242.4,1264.7 1249.75,1264.7 ; 1242.4,1265.75 1249.75,1265.75 ; 1242.4,1266.8 1249.75,1266.8 ; 1242.4,1267.85 1249.75,1267.85 ; 1242.4,1268.9 1249.75,1268.9 ; 1242.4,1269.95 1249.75,1269.95 ; 1242.4,1271 1249.75,1271 ; 1242.4,1272.05 1249.75,1272.05 ; 1242.4,1273.1 1249.75,1273.1 ; 1242.4,1274.15 1249.75,1274.15 ; 1242.4,1275.2 1249.75,1275.2 ; 1242.4,1276.25 1249.75,1276.25 ; 1242.4,1277.3 1249.75,1277.3 ; 1242.4,1278.35 1249.75,1278.35 ; 1242.4,1279.4 1249.75,1279.4 ; 1242.4,1280.45 1249.75,1280.45 ; 1242.4,1281.5 1249.75,1281.5 ; 1242.4,1282.55 1249.75,1282.55 ; 1242.4,1283.6 1249.75,1283.6 ; 1242.4,1284.65 1249.75,1284.65 ; 1242.4,1285.7 1249.75,1285.7 ; 1242.4,1286.75 1249.75,1286.75 ; 1242.4,1287.8 1249.75,1287.8 ; 1242.4,1288.85 1249.75,1288.85 ; 1242.4,1289.9 1249.75,1289.9 ; 1242.4,1290.95 1249.75,1290.95 ; 1242.4,1292 1249.75,1292 ; 1242.4,1293.05 1249.75,1293.05 ; 1242.4,1294.1 1249.75,1294.1 ; 1242.4,1295.15 1249.75,1295.15 ; 1242.4,1296.2 1249.75,1296.2 ; 1242.4,1297.25 1249.75,1297.25 ; 1242.4,1298.3 1249.75,1298.3 ; 1243.45,1306.7 1249.75,1306.7 ; 1245.55,1307.75 1249.75,1307.75 ; 1270.75,1388.6 1279.15,1388.6 ; 1270.75,1389.65 1279.15,1389.65 ; 1270.75,1390.7 1279.15,1390.7 ; 1270.75,1391.75 1279.15,1391.75 ; 1270.75,1392.8 1279.15,1392.8 ; 1270.75,1393.85 1279.15,1393.85 ; 1270.75,1394.9 1279.15,1394.9 ; 1270.75,1395.95 1279.15,1395.95 ; 1270.75,1397 1279.15,1397 ; 1270.75,1398.05 1279.15,1398.05 ; 1270.75,1399.1 1279.15,1399.1 ; 1270.75,1400.15 1279.15,1400.15 ; 1270.75,1401.2 1279.15,1401.2 ; 1270.75,1402.25 1279.15,1402.25 ; 1270.75,1403.3 1279.15,1403.3 ; 1270.75,1404.35 1279.15,1404.35 ; 1270.75,1405.4 1279.15,1405.4 ; 1270.75,1406.45 1279.15,1406.45 ; 1270.75,1407.5 1279.15,1407.5 ; 1270.75,1408.55 1279.15,1408.55 ; 1270.75,1409.6 1279.15,1409.6 ; 1270.75,1410.65 1279.15,1410.65 ; 1270.75,1411.7 1279.15,1411.7 ; 1270.75,1412.75 1279.15,1412.75 ; 1270.75,1413.8 1279.15,1413.8 ; 1270.75,1414.85 1279.15,1414.85 ; 1270.75,1415.9 1279.15,1415.9 ; 1270.75,1416.95 1279.15,1416.95 ; 1270.75,1418 1279.15,1418 ; 1270.75,1419.05 1279.15,1419.05 ; 1270.75,1420.1 1279.15,1420.1 ; 1270.75,1421.15 1279.15,1421.15 ; 1270.75,1422.2 1279.15,1422.2 ; 1270.75,1423.25 1279.15,1423.25 ; 1270.75,1424.3 1279.15,1424.3 ; 1270.75,1425.35 1279.15,1425.35 ; 1270.75,1426.4 1279.15,1426.4 ; 1270.75,1427.45 1279.15,1427.45 ; 1270.75,1428.5 1279.15,1428.5 ; 1270.75,1429.55 1279.15,1429.55 ; 1270.75,1430.6 1279.15,1430.6 ; 1270.75,1431.65 1279.15,1431.65 ; 1270.75,1432.7 1279.15,1432.7 ; 1270.75,1433.75 1279.15,1433.75 ; 1270.75,1434.8 1279.15,1434.8 ; 1270.75,1435.85 1279.15,1435.85 ; 1270.75,1436.9 1279.15,1436.9 ; 1270.75,1437.95 1279.15,1437.95 ; 1270.75,1439 1279.15,1439 ; 1270.75,1440.05 1279.15,1440.05 ; 1270.75,1441.1 1279.15,1441.1 ; 1270.75,1442.15 1279.15,1442.15 ; 1270.75,1443.2 1279.15,1443.2 ; 1270.75,1444.25 1279.15,1444.25 ; 1270.75,1445.3 1279.15,1445.3 ; 1297,1449.5 1311.7,1449.5 ; 1298.05,1450.55 1310.65,1450.55 ; 1299.1,1451.6 1309.6,1451.6 ; 1300.15,1452.65 1308.55,1452.65 ; 1301.2,1453.7 1307.5,1453.7 ; 1302.25,1388.6 1318,1388.6 ; 1302.25,1454.75 1306.45,1454.75 ; 1303.3,1389.65 1316.95,1389.65 ; 1304.35,1390.7 1314.85,1390.7 ; 1304.35,1391.75 1313.8,1391.75 ; 1305.4,1392.8 1312.75,1392.8 ; 1306.45,1393.85 1311.7,1393.85 ; 1306.45,1394.9 1310.65,1394.9 ; 1327.45,1383.35 1413.55,1383.35 ; 1327.45,1384.4 1413.55,1384.4 ; 1328.5,1382.3 1414.6,1382.3 ; 1333.75,1434.8 1336.9,1434.8 ; 1333.75,1435.85 1336.9,1435.85 ; 1333.75,1436.9 1335.85,1436.9 ; 1333.75,1437.95 1334.8,1437.95 ; 1334.8,1432.7 1339,1432.7 ; 1334.8,1433.75 1337.95,1433.75 ; 1335.85,1429.55 1341.1,1429.55 ; 1335.85,1430.6 1340.05,1430.6 ; 1335.85,1431.65 1340.05,1431.65 ; 1336.9,1427.45 1343.2,1427.45 ; 1336.9,1428.5 1342.15,1428.5 ; 1337.95,1424.3 1345.3,1424.3 ; 1337.95,1425.35 1344.25,1425.35 ; 1337.95,1426.4 1343.2,1426.4 ; 1339,1420.1 1347.4,1420.1 ; 1339,1421.15 1347.4,1421.15 ; 1339,1422.2 1346.35,1422.2 ; 1339,1423.25 1345.3,1423.25 ; 1340.05,1416.95 1349.5,1416.95 ; 1340.05,1418 1348.45,1418 ; 1340.05,1419.05 1348.45,1419.05 ; 1341.1,1410.65 1351.6,1410.65 ; 1341.1,1411.7 1351.6,1411.7 ; 1341.1,1412.75 1350.55,1412.75 ; 1341.1,1413.8 1350.55,1413.8 ; 1341.1,1414.85 1350.55,1414.85 ; 1341.1,1415.9 1349.5,1415.9 ; 1342.15,1400.15 1346.35,1400.15 ; 1342.15,1401.2 1347.4,1401.2 ; 1342.15,1402.25 1348.45,1402.25 ; 1342.15,1403.3 1349.5,1403.3 ; 1342.15,1404.35 1349.5,1404.35 ; 1342.15,1405.4 1350.55,1405.4 ; 1342.15,1406.45 1350.55,1406.45 ; 1342.15,1407.5 1350.55,1407.5 ; 1342.15,1408.55 1351.6,1408.55 ; 1342.15,1409.6 1351.6,1409.6 ; 1343.2,1399.1 1345.3,1399.1 ; 1356.85,1385.45 1364.2,1385.45 ; 1356.85,1386.5 1364.2,1386.5 ; 1356.85,1387.55 1364.2,1387.55 ; 1356.85,1388.6 1364.2,1388.6 ; 1356.85,1389.65 1364.2,1389.65 ; 1356.85,1390.7 1364.2,1390.7 ; 1356.85,1391.75 1364.2,1391.75 ; 1356.85,1392.8 1364.2,1392.8 ; 1356.85,1393.85 1364.2,1393.85 ; 1356.85,1394.9 1364.2,1394.9 ; 1356.85,1395.95 1364.2,1395.95 ; 1356.85,1397 1364.2,1397 ; 1356.85,1398.05 1364.2,1398.05 ; 1356.85,1399.1 1364.2,1399.1 ; 1356.85,1400.15 1364.2,1400.15 ; 1356.85,1401.2 1364.2,1401.2 ; 1356.85,1402.25 1364.2,1402.25 ; 1356.85,1403.3 1364.2,1403.3 ; 1356.85,1404.35 1364.2,1404.35 ; 1356.85,1405.4 1364.2,1405.4 ; 1356.85,1406.45 1364.2,1406.45 ; 1356.85,1407.5 1364.2,1407.5 ; 1356.85,1408.55 1364.2,1408.55 ; 1356.85,1409.6 1364.2,1409.6 ; 1356.85,1410.65 1364.2,1410.65 ; 1356.85,1411.7 1364.2,1411.7 ; 1356.85,1412.75 1364.2,1412.75 ; 1356.85,1413.8 1364.2,1413.8 ; 1356.85,1414.85 1364.2,1414.85 ; 1356.85,1415.9 1364.2,1415.9 ; 1356.85,1416.95 1364.2,1416.95 ; 1356.85,1418 1364.2,1418 ; 1356.85,1419.05 1364.2,1419.05 ; 1356.85,1420.1 1364.2,1420.1 ; 1356.85,1421.15 1364.2,1421.15 ; 1356.85,1422.2 1364.2,1422.2 ; 1356.85,1423.25 1364.2,1423.25 ; 1356.85,1424.3 1364.2,1424.3 ; 1356.85,1425.35 1364.2,1425.35 ; 1356.85,1426.4 1364.2,1426.4 ; 1356.85,1427.45 1364.2,1427.45 ; 1356.85,1428.5 1364.2,1428.5 ; 1356.85,1429.55 1364.2,1429.55 ; 1356.85,1430.6 1364.2,1430.6 ; 1356.85,1431.65 1364.2,1431.65 ; 1356.85,1432.7 1364.2,1432.7 ; 1356.85,1433.75 1364.2,1433.75 ; 1356.85,1434.8 1364.2,1434.8 ; 1356.85,1435.85 1364.2,1435.85 ; 1356.85,1436.9 1364.2,1436.9 ; 1356.85,1437.95 1364.2,1437.95 ; 1356.85,1439 1364.2,1439 ; 1356.85,1440.05 1364.2,1440.05 ; 1356.85,1441.1 1364.2,1441.1 ; 1356.85,1442.15 1364.2,1442.15 ; 1356.85,1443.2 1364.2,1443.2 ; 1356.85,1444.25 1364.2,1444.25 ; 1356.85,1445.3 1364.2,1445.3 ; 1356.85,1446.35 1364.2,1446.35 ; 1356.85,1447.4 1364.2,1447.4 ; 1356.85,1448.45 1364.2,1448.45 ; 1356.85,1449.5 1364.2,1449.5 ; 1356.85,1450.55 1364.2,1450.55 ; 1356.85,1451.6 1364.2,1451.6 ; 1356.85,1452.65 1364.2,1452.65 ; 1356.85,1453.7 1364.2,1453.7 ; 1356.85,1454.75 1365.25,1454.75 ; 1356.85,1455.8 1367.35,1455.8 ; 1356.85,1456.85 1368.4,1456.85 ; 1356.85,1457.9 1368.4,1457.9 ; 1356.85,1458.95 1367.35,1458.95 ; 1356.85,1460 1363.15,1460 ; 1356.85,1461.05 1358.95,1461.05 ; 1375.75,1248.95 1379.95,1248.95 ; 1375.75,1250 1382.05,1250 ; 1375.75,1251.05 1383.1,1251.05 ; 1375.75,1252.1 1384.15,1252.1 ; 1375.75,1253.15 1384.15,1253.15 ; 1375.75,1254.2 1384.15,1254.2 ; 1375.75,1255.25 1384.15,1255.25 ; 1375.75,1256.3 1384.15,1256.3 ; 1375.75,1257.35 1384.15,1257.35 ; 1375.75,1258.4 1384.15,1258.4 ; 1375.75,1259.45 1384.15,1259.45 ; 1375.75,1260.5 1384.15,1260.5 ; 1375.75,1261.55 1402,1261.55 ; 1375.75,1262.6 1402,1262.6 ; 1375.75,1263.65 1402,1263.65 ; 1375.75,1264.7 1384.15,1264.7 ; 1375.75,1265.75 1384.15,1265.75 ; 1375.75,1266.8 1384.15,1266.8 ; 1375.75,1267.85 1384.15,1267.85 ; 1375.75,1268.9 1384.15,1268.9 ; 1375.75,1269.95 1384.15,1269.95 ; 1375.75,1271 1384.15,1271 ; 1375.75,1272.05 1384.15,1272.05 ; 1375.75,1273.1 1384.15,1273.1 ; 1375.75,1274.15 1384.15,1274.15 ; 1375.75,1275.2 1384.15,1275.2 ; 1375.75,1276.25 1384.15,1276.25 ; 1375.75,1277.3 1384.15,1277.3 ; 1375.75,1278.35 1384.15,1278.35 ; 1375.75,1279.4 1384.15,1279.4 ; 1375.75,1280.45 1384.15,1280.45 ; 1375.75,1281.5 1384.15,1281.5 ; 1375.75,1282.55 1384.15,1282.55 ; 1375.75,1283.6 1384.15,1283.6 ; 1375.75,1284.65 1384.15,1284.65 ; 1375.75,1285.7 1384.15,1285.7 ; 1375.75,1286.75 1384.15,1286.75 ; 1375.75,1287.8 1384.15,1287.8 ; 1375.75,1288.85 1384.15,1288.85 ; 1375.75,1289.9 1384.15,1289.9 ; 1375.75,1290.95 1384.15,1290.95 ; 1375.75,1292 1384.15,1292 ; 1375.75,1293.05 1384.15,1293.05 ; 1375.75,1294.1 1384.15,1294.1 ; 1375.75,1295.15 1384.15,1295.15 ; 1375.75,1296.2 1384.15,1296.2 ; 1375.75,1297.25 1404.1,1297.25 ; 1375.75,1298.3 1405.15,1298.3 ; 1375.75,1299.35 1405.15,1299.35 ; 1375.75,1300.4 1384.15,1300.4 ; 1375.75,1301.45 1382.05,1301.45 ; 1375.75,1302.5 1379.95,1302.5 ; 1375.75,1303.55 1376.8,1303.55 ; 1375.75,1385.45 1383.1,1385.45 ; 1375.75,1386.5 1383.1,1386.5 ; 1375.75,1387.55 1383.1,1387.55 ; 1375.75,1388.6 1383.1,1388.6 ; 1375.75,1389.65 1383.1,1389.65 ; 1375.75,1390.7 1383.1,1390.7 ; 1375.75,1391.75 1383.1,1391.75 ; 1375.75,1392.8 1383.1,1392.8 ; 1375.75,1393.85 1383.1,1393.85 ; 1375.75,1394.9 1383.1,1394.9 ; 1375.75,1395.95 1383.1,1395.95 ; 1375.75,1397 1383.1,1397 ; 1375.75,1398.05 1384.15,1398.05 ; 1375.75,1399.1 1385.2,1399.1 ; 1375.75,1400.15 1385.2,1400.15 ; 1375.75,1401.2 1386.25,1401.2 ; 1375.75,1402.25 1387.3,1402.25 ; 1375.75,1403.3 1388.35,1403.3 ; 1375.75,1404.35 1383.1,1404.35 ; 1375.75,1405.4 1383.1,1405.4 ; 1375.75,1406.45 1383.1,1406.45 ; 1375.75,1407.5 1383.1,1407.5 ; 1375.75,1408.55 1383.1,1408.55 ; 1375.75,1409.6 1383.1,1409.6 ; 1375.75,1410.65 1383.1,1410.65 ; 1375.75,1411.7 1383.1,1411.7 ; 1375.75,1412.75 1383.1,1412.75 ; 1375.75,1413.8 1383.1,1413.8 ; 1375.75,1414.85 1383.1,1414.85 ; 1375.75,1415.9 1383.1,1415.9 ; 1375.75,1416.95 1383.1,1416.95 ; 1375.75,1418 1383.1,1418 ; 1375.75,1419.05 1383.1,1419.05 ; 1375.75,1420.1 1383.1,1420.1 ; 1375.75,1421.15 1383.1,1421.15 ; 1375.75,1422.2 1383.1,1422.2 ; 1375.75,1423.25 1383.1,1423.25 ; 1375.75,1424.3 1383.1,1424.3 ; 1375.75,1425.35 1383.1,1425.35 ; 1375.75,1426.4 1383.1,1426.4 ; 1375.75,1427.45 1383.1,1427.45 ; 1375.75,1428.5 1383.1,1428.5 ; 1375.75,1429.55 1383.1,1429.55 ; 1375.75,1430.6 1383.1,1430.6 ; 1375.75,1431.65 1383.1,1431.65 ; 1375.75,1432.7 1383.1,1432.7 ; 1375.75,1433.75 1383.1,1433.75 ; 1375.75,1434.8 1383.1,1434.8 ; 1375.75,1435.85 1383.1,1435.85 ; 1375.75,1436.9 1383.1,1436.9 ; 1375.75,1437.95 1383.1,1437.95 ; 1375.75,1439 1383.1,1439 ; 1375.75,1440.05 1383.1,1440.05 ; 1375.75,1441.1 1383.1,1441.1 ; 1375.75,1442.15 1383.1,1442.15 ; 1375.75,1443.2 1383.1,1443.2 ; 1375.75,1444.25 1383.1,1444.25 ; 1375.75,1445.3 1383.1,1445.3 ; 1375.75,1446.35 1383.1,1446.35 ; 1375.75,1447.4 1383.1,1447.4 ; 1375.75,1448.45 1383.1,1448.45 ; 1375.75,1449.5 1383.1,1449.5 ; 1375.75,1450.55 1383.1,1450.55 ; 1375.75,1451.6 1383.1,1451.6 ; 1375.75,1452.65 1383.1,1452.65 ; 1375.75,1453.7 1383.1,1453.7 ; 1375.75,1454.75 1384.15,1454.75 ; 1375.75,1455.8 1386.25,1455.8 ; 1375.75,1456.85 1387.3,1456.85 ; 1375.75,1457.9 1387.3,1457.9 ; 1375.75,1458.95 1386.25,1458.95 ; 1375.75,1460 1384.15,1460 ; 1375.75,1461.05 1379.95,1461.05 ; 1385.2,1404.35 1389.4,1404.35 ; 1385.2,1405.4 1390.45,1405.4 ; 1386.25,1406.45 1390.45,1406.45 ; 1386.25,1407.5 1391.5,1407.5 ; 1387.3,1408.55 1392.55,1408.55 ; 1387.3,1409.6 1393.6,1409.6 ; 1388.35,1410.65 1393.6,1410.65 ; 1388.35,1411.7 1394.65,1411.7 ; 1389.4,1412.75 1395.7,1412.75 ; 1389.4,1413.8 1395.7,1413.8 ; 1390.45,1414.85 1396.75,1414.85 ; 1390.45,1415.9 1397.8,1415.9 ; 1391.5,1416.95 1397.8,1416.95 ; 1391.5,1418 1398.85,1418 ; 1391.5,1419.05 1399.9,1419.05 ; 1392.55,1300.4 1403.05,1300.4 ; 1392.55,1420.1 1399.9,1420.1 ; 1392.55,1421.15 1400.95,1421.15 ; 1393.6,1301.45 1400.95,1301.45 ; 1393.6,1422.2 1402,1422.2 ; 1393.6,1423.25 1402,1423.25 ; 1393.6,1424.3 1403.05,1424.3 ; 1394.65,1254.2 1397.8,1254.2 ; 1394.65,1255.25 1399.9,1255.25 ; 1394.65,1256.3 1402,1256.3 ; 1394.65,1257.35 1402,1257.35 ; 1394.65,1258.4 1402,1258.4 ; 1394.65,1259.45 1402,1259.45 ; 1394.65,1260.5 1402,1260.5 ; 1394.65,1264.7 1402,1264.7 ; 1394.65,1265.75 1402,1265.75 ; 1394.65,1266.8 1402,1266.8 ; 1394.65,1267.85 1402,1267.85 ; 1394.65,1268.9 1402,1268.9 ; 1394.65,1269.95 1402,1269.95 ; 1394.65,1271 1403.05,1271 ; 1394.65,1272.05 1404.1,1272.05 ; 1394.65,1273.1 1405.15,1273.1 ; 1394.65,1274.15 1407.25,1274.15 ; 1394.65,1275.2 1402,1275.2 ; 1394.65,1276.25 1402,1276.25 ; 1394.65,1277.3 1402,1277.3 ; 1394.65,1278.35 1402,1278.35 ; 1394.65,1279.4 1402,1279.4 ; 1394.65,1280.45 1402,1280.45 ; 1394.65,1281.5 1402,1281.5 ; 1394.65,1282.55 1402,1282.55 ; 1394.65,1283.6 1402,1283.6 ; 1394.65,1284.65 1402,1284.65 ; 1394.65,1285.7 1402,1285.7 ; 1394.65,1286.75 1402,1286.75 ; 1394.65,1287.8 1402,1287.8 ; 1394.65,1288.85 1402,1288.85 ; 1394.65,1289.9 1402,1289.9 ; 1394.65,1290.95 1402,1290.95 ; 1394.65,1292 1402,1292 ; 1394.65,1293.05 1402,1293.05 ; 1394.65,1294.1 1402,1294.1 ; 1394.65,1295.15 1402,1295.15 ; 1394.65,1296.2 1402,1296.2 ; 1394.65,1302.5 1399.9,1302.5 ; 1394.65,1425.35 1403.05,1425.35 ; 1394.65,1426.4 1404.1,1426.4 ; 1394.65,1427.45 1405.15,1427.45 ; 1395.7,1428.5 1405.15,1428.5 ; 1395.7,1429.55 1406.2,1429.55 ; 1395.7,1430.6 1406.2,1430.6 ; 1396.75,1431.65 1407.25,1431.65 ; 1396.75,1432.7 1408.3,1432.7 ; 1396.75,1433.75 1410.4,1433.75 ; 1397.8,1434.8 1410.4,1434.8 ; 1397.8,1435.85 1409.35,1435.85 ; 1397.8,1436.9 1407.25,1436.9 ; 1398.85,1385.45 1412.5,1385.45 ; 1398.85,1386.5 1411.45,1386.5 ; 1398.85,1437.95 1406.2,1437.95 ; 1398.85,1439 1404.1,1439 ; 1398.85,1440.05 1402,1440.05 ; 1399.9,1387.55 1410.4,1387.55 ; 1400.95,1388.6 1409.35,1388.6 ; 1402,1389.65 1408.3,1389.65 ; 1403.05,1275.2 1408.3,1275.2 ; 1403.05,1390.7 1406.2,1390.7 ; 1404.1,1276.25 1409.35,1276.25 ; 1404.1,1391.75 1405.15,1391.75 ; 1405.15,1277.3 1410.4,1277.3 ; 1406.2,1278.35 1411.45,1278.35 ; 1406.2,1279.4 1412.5,1279.4 ; 1407.25,1226.9 1409.35,1226.9 ; 1407.25,1227.95 1412.5,1227.95 ; 1407.25,1229 1414.6,1229 ; 1407.25,1230.05 1415.65,1230.05 ; 1407.25,1231.1 1415.65,1231.1 ; 1407.25,1232.15 1415.65,1232.15 ; 1407.25,1233.2 1415.65,1233.2 ; 1407.25,1234.25 1415.65,1234.25 ; 1407.25,1235.3 1415.65,1235.3 ; 1407.25,1236.35 1415.65,1236.35 ; 1407.25,1237.4 1415.65,1237.4 ; 1407.25,1238.45 1447.15,1238.45 ; 1407.25,1239.5 1447.15,1239.5 ; 1407.25,1240.55 1447.15,1240.55 ; 1407.25,1241.6 1415.65,1241.6 ; 1407.25,1242.65 1415.65,1242.65 ; 1407.25,1243.7 1415.65,1243.7 ; 1407.25,1244.75 1415.65,1244.75 ; 1407.25,1245.8 1415.65,1245.8 ; 1407.25,1246.85 1415.65,1246.85 ; 1407.25,1247.9 1415.65,1247.9 ; 1407.25,1248.95 1415.65,1248.95 ; 1407.25,1250 1415.65,1250 ; 1407.25,1251.05 1415.65,1251.05 ; 1407.25,1252.1 1415.65,1252.1 ; 1407.25,1253.15 1415.65,1253.15 ; 1407.25,1254.2 1415.65,1254.2 ; 1407.25,1255.25 1415.65,1255.25 ; 1407.25,1256.3 1415.65,1256.3 ; 1407.25,1257.35 1415.65,1257.35 ; 1407.25,1258.4 1415.65,1258.4 ; 1407.25,1259.45 1415.65,1259.45 ; 1407.25,1260.5 1450.3,1260.5 ; 1407.25,1261.55 1449.25,1261.55 ; 1407.25,1262.6 1448.2,1262.6 ; 1407.25,1263.65 1415.65,1263.65 ; 1407.25,1264.7 1413.55,1264.7 ; 1407.25,1265.75 1410.4,1265.75 ; 1407.25,1280.45 1413.55,1280.45 ; 1408.3,1281.5 1414.6,1281.5 ; 1409.35,1282.55 1415.65,1282.55 ; 1409.35,1283.6 1416.7,1283.6 ; 1410.4,1284.65 1416.7,1284.65 ; 1411.45,1276.25 1442.95,1276.25 ; 1411.45,1277.3 1442.95,1277.3 ; 1411.45,1285.7 1417.75,1285.7 ; 1411.45,1286.75 1418.8,1286.75 ; 1412.5,1275.2 1442.95,1275.2 ; 1412.5,1287.8 1419.85,1287.8 ; 1412.5,1288.85 1419.85,1288.85 ; 1413.55,1289.9 1420.9,1289.9 ; 1414.6,1290.95 1421.95,1290.95 ; 1414.6,1292 1423,1292 ; 1415.65,1293.05 1423,1293.05 ; 1415.65,1294.1 1424.05,1294.1 ; 1416.7,1295.15 1424.05,1295.15 ; 1416.7,1296.2 1425.1,1296.2 ; 1416.7,1297.25 1426.15,1297.25 ; 1417.75,1298.3 1426.15,1298.3 ; 1417.75,1299.35 1427.2,1299.35 ; 1418.8,1300.4 1427.2,1300.4 ; 1418.8,1301.45 1428.25,1301.45 ; 1418.8,1302.5 1428.25,1302.5 ; 1419.85,1303.55 1433.5,1303.55 ; 1419.85,1304.6 1432.45,1304.6 ; 1419.85,1305.65 1431.4,1305.65 ; 1420.9,1306.7 1431.4,1306.7 ; 1420.9,1307.75 1431.4,1307.75 ; 1420.9,1308.8 1432.45,1308.8 ; 1421.95,1309.85 1434.55,1309.85 ; 1421.95,1310.9 1434.55,1310.9 ; 1421.95,1311.95 1433.5,1311.95